# Altium PCB I2C_module_v1.PcbDoc (part 4 of 4)
Units mil, origin at the board's own origin, x right, y up, seen from the top; angles counter-clockwise.
Board outline 3300 x 2890 mil, 2 copper layers (Top Layer, Bottom Layer); 41 components, 28 nets, 177 pads, 28 vias.
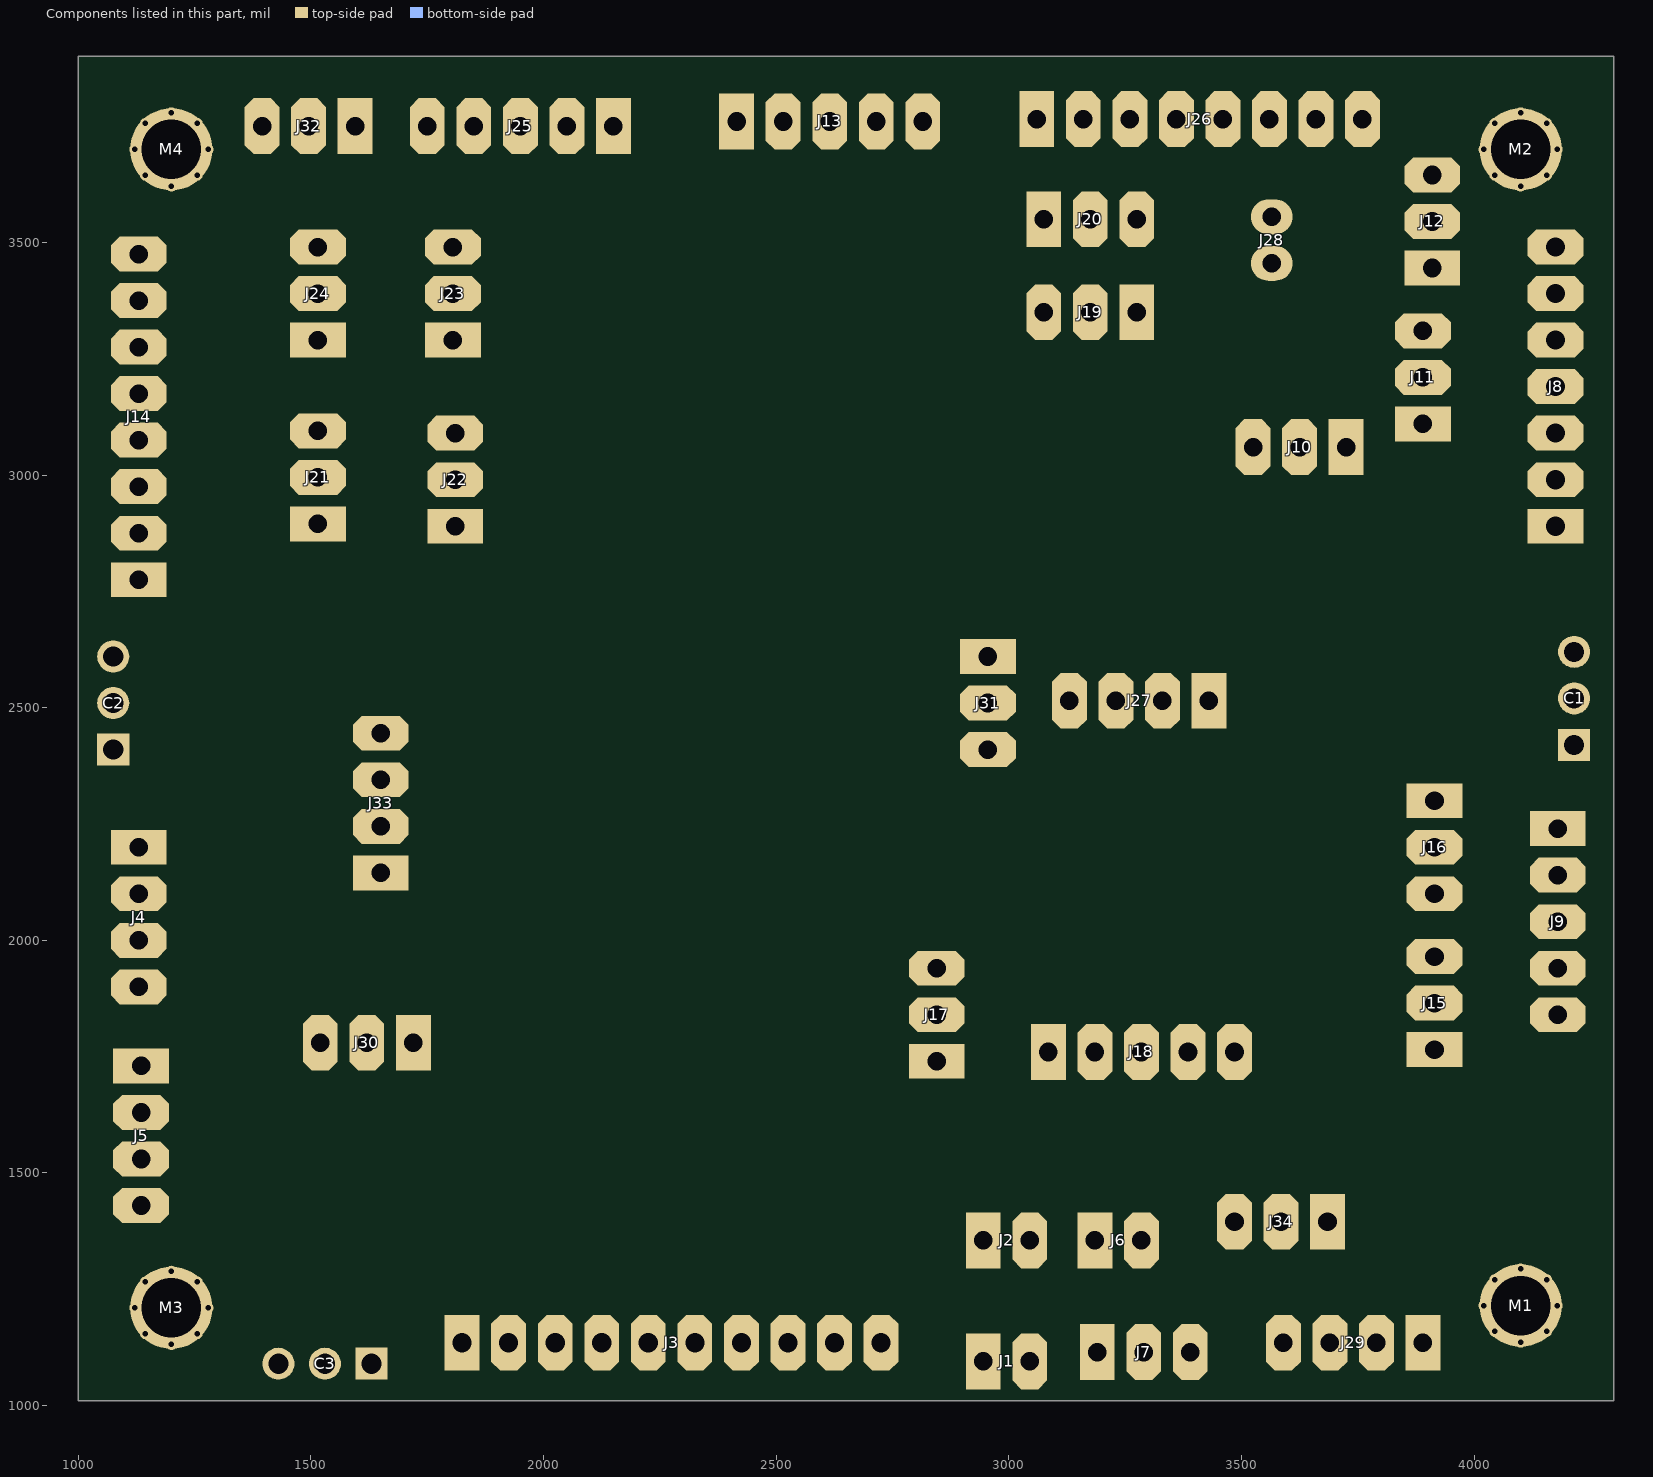
[diagram p4: the components of this part, seen from the top]

## Via types
v1: diameter 50, hole 28, Top Layer to Bottom Layer, 28 vias

## Nets (pads, with @x,y where several pads share a name; then routed paths per layer and width w, separated by ;. In a path a pad name is that pad's centre, name@x,y a point inside that pad or via, vN(x,y) a via of type N, cw(c..) or ccw(c..) an arc to the next point about the centre after c; other vN are vias at no path point) (continued)
copper on no net: (continued)
  Top Layer w0.3: 2066.4,2140.1 2068.8,2140.1 ; 2066.4,2153 2073.9,2153 ; 2066.4,2157.2 2073.9,2157.2 ; 2066.4,2157.5 2073.9,2157.5 ; 2066.4,2189.9 2073.9,2189.9 ; 2066.4,2190.2 2073.9,2190.2 ; 2066.4,2194.4 2073.9,2194.4 ; 2066.4,2282.6 2079.6,2282.6 ; 2066.4,2386.7 2069.7,2386.7 ; 2066.7,2130.5 2068.8,2130.5 ; 2066.7,2130.8 2068.8,2130.8 ; 2066.7,2131.1 2068.8,2131.1 ; 2066.7,2131.4 2068.8,2131.4 ; 2066.7,2131.7 2068.8,2131.7 ; 2066.7,2132 2068.8,2132 ; 2066.7,2132.3 2068.8,2132.3 ; 2066.7,2132.6 2068.8,2132.6 ; 2066.7,2132.9 2068.8,2132.9 ; 2066.7,2133.2 2068.8,2133.2 ; 2066.7,2133.5 2068.8,2133.5 ; 2066.7,2133.8 2068.8,2133.8 ; 2066.7,2134.1 2068.8,2134.1 ; 2066.7,2134.4 2068.8,2134.4 ; 2066.7,2134.7 2068.8,2134.7 ; 2066.7,2135 2068.8,2135 ; 2066.7,2135.3 2068.8,2135.3 ; 2066.7,2135.6 2068.8,2135.6 ; 2066.7,2135.9 2068.8,2135.9 ; 2066.7,2136.2 2068.8,2136.2 ; 2066.7,2136.5 2068.8,2136.5 ; 2066.7,2136.8 2068.8,2136.8 ; 2066.7,2137.1 2068.8,2137.1 ; 2066.7,2137.4 2068.8,2137.4 ; 2066.7,2137.7 2068.8,2137.7 ; 2066.7,2138 2068.8,2138 ; 2066.7,2138.3 2068.8,2138.3 ; 2066.7,2138.6 2068.8,2138.6 ; 2066.7,2138.9 2068.8,2138.9 ; 2066.7,2152.4 2073.6,2152.4 ; 2066.7,2152.7 2073.6,2152.7 ; 2066.7,2157.8 2073.6,2157.8 ; 2066.7,2189.6 2073.6,2189.6 ; 2066.7,2194.7 2073.9,2194.7 ; 2066.7,2195 2073.6,2195 ; 2067,2152.1 2073.3,2152.1 ; 2067,2158.1 2073.3,2158.1 ; 2067,2189.3 2073.3,2189.3 ; 2067,2195.3 2073.3,2195.3 ; 2067,2282.9 2080.2,2282.9 ; 2067,2387 2070,2387 ; 2067.3,2151.8 2073,2151.8 ; 2067.3,2158.4 2073,2158.4 ; 2067.3,2189 2073,2189 ; 2067.3,2195.6 2073,2195.6 ; 2067.3,2387.3 2070.3,2387.3 ; 2067.6,2158.7 2072.7,2158.7 ; 2067.6,2188.7 2072.7,2188.7 ; 2067.6,2387.6 2070.6,2387.6 ; 2067.6,2459 2111.1,2459 ; 2067.9,2151.5 2072.4,2151.5 ; 2067.9,2195.9 2072.4,2195.9 ; 2067.9,2283.2 2080.8,2283.2 ; 2067.9,2387.9 2071.2,2387.9 ; 2068.2,2159 2072.1,2159 ; 2068.2,2188.4 2072.1,2188.4 ; 2068.2,2196.2 2072.1,2196.2 ; 2068.2,2388.2 2071.5,2388.2 ; 2068.5,2151.2 2072.1,2151.2 ; 2068.5,2283.5 2081.4,2283.5 ; 2068.5,2388.5 2071.8,2388.5 ; 2068.8,2388.8 2072.1,2388.8 ; 2069.1,2159.3 2071.2,2159.3 ; 2069.1,2188.1 2071.2,2188.1 ; 2069.1,2283.8 2082,2283.8 ; 2069.4,2150.9 2070.9,2150.9 ; 2069.4,2196.5 2070.9,2196.5 ; 2069.4,2389.1 2072.7,2389.1 ; 2069.4,2458.7 2111.7,2458.7 ; 2069.7,2284.1 2082.6,2284.1 ; 2069.7,2389.4 2073,2389.4 ; 2070,2389.7 2073.3,2389.7 ; 2070.3,2284.4 2082.9,2284.4 ; 2070.3,2390 2073.6,2390 ; 2070.6,2390.3 2073.9,2390.3 ; 2070.9,2284.7 2083.5,2284.7 ; 2070.9,2390.6 2074.5,2390.6 ; 2070.9,2458.4 2112,2458.4 ; 2071.2,2390.9 2074.8,2390.9 ; 2071.5,2285 2084.1,2285 ; 2071.8,2391.2 2075.1,2391.2 ; 2072.1,2285.3 2084.7,2285.3 ; 2072.1,2391.5 2075.4,2391.5 ; 2072.4,2391.8 2076,2391.8 ; 2072.4,2458.1 2112.6,2458.1 ; 2072.7,2285.6 2085.3,2285.6 ; 2072.7,2392.1 2076.3,2392.1 ; 2073,2392.4 2076.6,2392.4 ; 2073.3,2285.9 2085.9,2285.9 ; 2073.3,2392.7 2076.9,2392.7 ; 2073.6,2286.2 2086.2,2286.2 ; 2073.6,2393 2077.5,2393 ; 2073.9,2393.3 2077.8,2393.3 ; 2073.9,2457.8 2112.9,2457.8 ; 2074.2,2286.5 2086.8,2286.5 ; 2074.5,2393.6 2078.1,2393.6 ; 2074.8,2286.8 2087.4,2286.8 ; 2074.8,2393.9 2078.4,2393.9 ; 2075.1,2394.2 2078.7,2394.2 ; 2075.1,2457.5 2113.5,2457.5 ; 2075.4,2287.1 2087.7,2287.1 ; 2075.4,2394.5 2079.3,2394.5 ; 2075.7,2394.8 2079.6,2394.8 ; 2076,2153 2084.7,2153 ; 2076,2194.4 2084.7,2194.4 ; 2076,2287.4 2088.3,2287.4 ; 2076,2395.1 2079.9,2395.1 ; 2076,2457.2 2114.1,2457.2 ; 2076.3,2151.5 2084.4,2151.5 ; 2076.3,2151.8 2084.4,2151.8 ; 2076.3,2152.1 2084.7,2152.1 ; 2076.3,2152.4 2084.7,2152.4 ; 2076.3,2152.7 2084.7,2152.7 ; 2076.3,2153.3 2084.7,2153.3 ; 2076.3,2153.6 2084.7,2153.6 ; 2076.3,2153.9 2084.7,2153.9 ; 2076.3,2154.2 2084.7,2154.2 ; 2076.3,2154.5 2084.4,2154.5 ; 2076.3,2154.8 2084.4,2154.8 ; 2076.3,2192.9 2084.4,2192.9 ; 2076.3,2193.2 2084.7,2193.2 ; 2076.3,2193.5 2084.7,2193.5 ; 2076.3,2193.8 2084.7,2193.8 ; 2076.3,2194.1 2084.7,2194.1 ; 2076.3,2194.7 2084.7,2194.7 ; 2076.3,2195 2084.7,2195 ; 2076.3,2195.3 2084.7,2195.3 ; 2076.3,2195.6 2084.4,2195.6 ; 2076.3,2195.9 2084.4,2195.9 ; 2076.3,2287.7 2088.9,2287.7 ; 2076.3,2395.4 2080.2,2395.4 ; 2076.6,2150.9 2084.1,2150.9 ; 2076.6,2151.2 2084.4,2151.2 ; 2076.6,2155.1 2084.4,2155.1 ; 2076.6,2192.3 2084.1,2192.3 ; 2076.6,2192.6 2084.4,2192.6 ; 2076.6,2196.2 2084.4,2196.2 ; 2076.6,2196.5 2084.1,2196.5 ; 2076.9,2150.6 2084.1,2150.6 ; 2076.9,2155.4 2084.1,2155.4 ; 2076.9,2155.7 2083.8,2155.7 ; 2076.9,2191.7 2083.8,2191.7 ; 2076.9,2192 2084.1,2192 ; 2076.9,2196.8 2084.1,2196.8 ; 2076.9,2288 2089.2,2288 ; 2076.9,2395.7 2080.8,2395.7 ; 2077.2,2150.3 2083.8,2150.3 ; 2077.2,2156 2083.5,2156 ; 2077.2,2191.4 2083.5,2191.4 ; 2077.2,2197.1 2083.8,2197.1 ; 2077.2,2396 2081.1,2396 ; 2077.2,2456.9 2114.4,2456.9 ; 2077.5,2150 2083.5,2150 ; 2077.5,2156.3 2083.2,2156.3 ; 2077.5,2191.1 2083.2,2191.1 ; 2077.5,2197.4 2083.5,2197.4 ; 2077.5,2288.3 2089.8,2288.3 ; 2077.5,2396.3 2081.4,2396.3 ; 2077.8,2149.7 2083.2,2149.7 ; 2077.8,2156.6 2082.9,2156.6 ; 2077.8,2190.8 2082.9,2190.8 ; 2077.8,2197.7 2083.2,2197.7 ; 2077.8,2288.6 2090.4,2288.6 ; 2077.8,2396.6 2081.7,2396.6 ; 2078.1,2149.4 2082.6,2149.4 ; 2078.1,2198 2082.6,2198 ; 2078.1,2396.9 2082,2396.9 ; 2078.1,2456.6 2115,2456.6 ; 2078.4,2156.9 2082.6,2156.9 ; 2078.4,2190.5 2082.3,2190.5 ; 2078.4,2288.9 2090.7,2288.9 ; 2078.4,2397.2 2082.6,2397.2 ; 2078.7,2149.1 2082,2149.1 ; 2078.7,2198.3 2082.3,2198.3 ; 2078.7,2397.5 2082.9,2397.5 ; 2079,2157.2 2081.7,2157.2 ; 2079,2289.2 2091.3,2289.2 ; 2079.3,2190.2 2081.7,2190.2 ; 2079.3,2289.5 2091.6,2289.5 ; 2079.3,2397.8 2083.2,2397.8 ; 2079.3,2456.3 2115.3,2456.3 ; 2079.6,2132.6 2082.3,2132.6 ; 2079.6,2132.9 2082.3,2132.9 ; 2079.6,2133.2 2082,2133.2 ; 2079.6,2133.5 2082,2133.5 ; 2079.6,2133.8 2082,2133.8 ; 2079.6,2134.1 2082,2134.1 ; 2079.6,2134.4 2082,2134.4 ; 2079.6,2134.7 2082,2134.7 ; 2079.6,2135 2082,2135 ; 2079.6,2135.3 2082,2135.3 ; 2079.6,2135.6 2082,2135.6 ; 2079.6,2135.9 2082.3,2135.9 ; 2079.6,2136.2 2082.3,2136.2 ; 2079.6,2398.1 2083.5,2398.1 ; 2079.9,2131.7 2082.6,2131.7 ; 2079.9,2132 2082.3,2132 ; 2079.9,2132.3 2082.3,2132.3 ; 2079.9,2136.5 2082.3,2136.5 ; 2079.9,2136.8 2082.3,2136.8 ; 2079.9,2137.1 2082.3,2137.1 ; 2079.9,2137.4 2082.6,2137.4 ; 2079.9,2198.6 2081.1,2198.6 ; 2079.9,2289.8 2092.2,2289.8 ; 2079.9,2398.4 2084.1,2398.4 ; 2080.2,2131.1 2082.6,2131.1 ; 2080.2,2131.4 2082.6,2131.4 ; 2080.2,2137.7 2082.6,2137.7 ; 2080.2,2138 2082.6,2138 ; 2080.2,2290.1 2092.5,2290.1 ; 2080.2,2398.7 2084.4,2398.7 ; 2080.2,2456 2115.9,2456 ; 2080.5,2130.5 2083.2,2130.5 ; 2080.5,2130.8 2082.9,2130.8 ; 2080.5,2138.3 2082.9,2138.3 ; 2080.5,2138.6 2082.9,2138.6 ; 2080.5,2399 2084.7,2399 ; 2080.8,2129.9 2083.5,2129.9 ; 2080.8,2130.2 2083.2,2130.2 ; 2080.8,2138.9 2083.2,2138.9 ; 2080.8,2290.4 2093.1,2290.4 ; 2080.8,2399.3 2085,2399.3 ; 2081.1,2129.6 2084.1,2129.6 ; 2081.1,2139.2 2083.5,2139.2 ; 2081.1,2399.6 2085.6,2399.6 ; 2081.1,2455.7 2116.2,2455.7 ; 2081.4,2129.3 2084.4,2129.3 ; 2081.4,2139.5 2083.5,2139.5 ; 2081.4,2290.7 2093.4,2290.7 ; 2081.7,2129 2085,2129 ; 2081.7,2139.8 2083.8,2139.8 ; 2081.7,2291 2094,2291 ; 2081.7,2399.9 2085.9,2399.9 ; 2081.7,2455.4 2116.8,2455.4 ; 2082,2140.1 2084.4,2140.1 ; 2082,2400.2 2086.2,2400.2 ; 2082.3,2140.4 2085,2140.4 ; 2082.3,2291.3 2094.3,2291.3 ; 2082.3,2400.5 2086.5,2400.5 ; 2082.6,2140.7 2086.2,2140.7 ; 2082.6,2291.6 2094.9,2291.6 ; 2082.6,2400.8 2086.8,2400.8 ; 2082.6,2455.1 2117.1,2455.1 ; 2082.9,2401.1 2087.4,2401.1 ; 2083.2,2141 2089.5,2141 ; 2083.2,2291.9 2095.2,2291.9 ; 2083.2,2401.4 2087.7,2401.4 ; 2083.5,2292.2 2095.8,2292.2 ; 2083.5,2401.7 2088,2401.7 ; 2083.5,2454.8 2117.4,2454.8 ; 2083.8,2141.3 2088.6,2141.3 ; 2084.1,2292.5 2096.1,2292.5 ; 2084.1,2402 2088.3,2402 ; 2084.1,2454.5 2118,2454.5 ; 2084.4,2292.8 2096.7,2292.8 ; 2084.4,2402.3 2088.9,2402.3 ; 2084.7,2402.6 2089.2,2402.6 ; 2085,2141.6 2087.7,2141.6 ; 2085,2293.1 2097,2293.1 ; 2085,2402.9 2089.5,2402.9 ; 2085,2454.2 2118.3,2454.2 ; 2085.3,2293.4 2097.3,2293.4 ; 2085.3,2403.2 2089.8,2403.2 ; 2085.6,2293.7 2097.9,2293.7 ; 2085.6,2403.5 2090.1,2403.5 ; 2085.6,2453.9 2118.6,2453.9 ; 2085.9,2403.8 2090.7,2403.8 ; 2086.2,2294 2098.2,2294 ; 2086.5,2149.1 2091.3,2149.1 ; 2086.5,2149.4 2092.8,2149.4 ; 2086.5,2149.7 2094.3,2149.7 ; 2086.5,2150 2095.5,2150 ; 2086.5,2150.3 2096.4,2150.3 ; 2086.5,2150.6 2097.3,2150.6 ; 2086.5,2150.9 2098.2,2150.9 ; 2086.5,2151.2 2098.8,2151.2 ; 2086.5,2151.5 2099.7,2151.5 ; 2086.5,2151.8 2100.3,2151.8 ; 2086.5,2152.1 2100.9,2152.1 ; 2086.5,2152.4 2101.5,2152.4 ; 2086.5,2152.7 2102.1,2152.7 ; 2086.5,2153 2102.7,2153 ; 2086.5,2153.3 2103,2153.3 ; 2086.5,2153.6 2103.6,2153.6 ; 2086.5,2153.9 2104.2,2153.9 ; 2086.5,2154.2 2104.5,2154.2 ; 2086.5,2154.5 2105.1,2154.5 ; 2086.5,2154.8 2105.4,2154.8 ; 2086.5,2155.1 2105.7,2155.1 ; 2086.5,2155.4 2106.3,2155.4 ; 2086.5,2155.7 2106.6,2155.7 ; 2086.5,2156 2106.9,2156 ; 2086.5,2156.3 2107.2,2156.3 ; 2086.5,2156.6 2107.5,2156.6 ; 2086.5,2156.9 2107.8,2156.9 ; 2086.5,2157.2 2108.1,2157.2 ; 2086.5,2190.2 2108.4,2190.2 ; 2086.5,2190.5 2108.1,2190.5 ; 2086.5,2190.8 2107.8,2190.8 ; 2086.5,2191.1 2107.2,2191.1 ; 2086.5,2191.4 2106.9,2191.4 ; 2086.5,2191.7 2106.6,2191.7 ; 2086.5,2192 2106.3,2192 ; 2086.5,2192.3 2106,2192.3 ; 2086.5,2192.6 2105.4,2192.6 ; 2086.5,2192.9 2105.1,2192.9 ; 2086.5,2193.2 2104.5,2193.2 ; 2086.5,2193.5 2104.2,2193.5 ; 2086.5,2193.8 2103.6,2193.8 ; 2086.5,2194.1 2103.3,2194.1 ; 2086.5,2194.4 2102.7,2194.4 ; 2086.5,2194.7 2102.1,2194.7 ; 2086.5,2195 2101.5,2195 ; 2086.5,2195.3 2100.9,2195.3 ; 2086.5,2195.6 2100.3,2195.6 ; 2086.5,2195.9 2099.7,2195.9 ; 2086.5,2196.2 2099.1,2196.2 ; 2086.5,2196.5 2098.2,2196.5 ; 2086.5,2196.8 2097.6,2196.8 ; 2086.5,2197.1 2096.7,2197.1 ; 2086.5,2197.4 2095.8,2197.4 ; 2086.5,2197.7 2094.6,2197.7 ; 2086.5,2198 2093.1,2198 ; 2086.5,2198.3 2091.6,2198.3 ; 2086.5,2198.6 2088.6,2198.6 ; 2086.5,2294.3 2098.5,2294.3 ; 2086.5,2404.1 2091,2404.1 ; 2086.5,2453.6 2119.2,2453.6 ; 2086.8,2140.7 2091,2140.7 ; 2086.8,2404.4 2091.3,2404.4 ; 2087.1,2294.6 2099.1,2294.6 ; 2087.1,2404.7 2091.6,2404.7 ; 2087.1,2453.3 2119.5,2453.3 ; 2087.4,2294.9 2099.4,2294.9 ; 2087.4,2405 2092.2,2405 ; 2087.7,2295.2 2099.7,2295.2 ; 2087.7,2405.3 2092.5,2405.3 ; 2087.7,2453 2119.8,2453 ; 2088,2140.4 2091.3,2140.4 ; 2088,2405.6 2092.8,2405.6 ; 2088.3,2157.5 2108.4,2157.5 ; 2088.3,2295.5 2100.3,2295.5 ; 2088.3,2405.9 2093.1,2405.9 ; 2088.3,2452.7 2120.1,2452.7 ; 2088.6,2129 2090.1,2129 ; 2088.6,2140.1 2091.3,2140.1 ; 2088.6,2295.8 2100.6,2295.8 ; 2088.9,2189.9 2108.7,2189.9 ; 2088.9,2406.2 2093.7,2406.2 ; 2089.2,2129.3 2090.4,2129.3 ; 2089.2,2139.8 2091.3,2139.8 ; 2089.2,2296.1 2100.9,2296.1 ; 2089.2,2406.5 2094,2406.5 ; 2089.2,2452.4 2120.7,2452.4 ; 2089.5,2129.6 2090.7,2129.6 ; 2089.5,2139.5 2091.3,2139.5 ; 2089.5,2296.4 2101.5,2296.4 ; 2089.5,2406.8 2094.3,2406.8 ; 2089.8,2129.9 2091,2129.9 ; 2089.8,2138.9 2091.3,2138.9 ; 2089.8,2139.2 2091.3,2139.2 ; 2089.8,2296.7 2101.8,2296.7 ; 2089.8,2407.1 2094.6,2407.1 ; 2089.8,2452.1 2121,2452.1 ; 2090.1,2130.2 2091.3,2130.2 ; 2090.1,2138.3 2091.3,2138.3 ; 2090.1,2138.6 2091.3,2138.6 ; 2090.1,2141 2091,2141 ; 2090.1,2407.4 2094.9,2407.4 ; 2090.4,2130.5 2091.3,2130.5 ; 2090.4,2137.7 2091.3,2137.7 ; 2090.4,2138 2091.3,2138 ; 2090.4,2141.3 2091,2141.3 ; 2090.4,2141.6 2091,2141.6 ; 2090.4,2157.8 2108.7,2157.8 ; 2090.4,2297 2102.1,2297 ; 2090.4,2407.7 2095.5,2407.7 ; 2090.4,2451.8 2121.3,2451.8 ; 2090.7,2130.8 2091.6,2130.8 ; 2090.7,2131.1 2091.6,2131.1 ; 2090.7,2137.1 2091.3,2137.1 ; 2090.7,2137.4 2091.3,2137.4 ; 2090.7,2297.3 2102.4,2297.3 ; 2090.7,2408 2095.8,2408 ; 2091,2131.4 2091.3,2131.4 ; 2091,2189.6 2109,2189.6 ; 2091,2297.6 2103,2297.6 ; 2091,2408.3 2096.1,2408.3 ; 2091,2451.5 2121.6,2451.5 ; 2091.3,2297.9 2103.3,2297.9 ; 2091.6,2408.6 2096.4,2408.6 ; 2091.6,2451.2 2121.9,2451.2 ; 2091.9,2158.1 2109,2158.1 ; 2091.9,2298.2 2103.6,2298.2 ; 2091.9,2408.9 2097,2408.9 ; 2092.2,2189.3 2109.3,2189.3 ; 2092.2,2298.5 2103.9,2298.5 ; 2092.2,2409.2 2097.3,2409.2 ; 2092.2,2450.9 2122.2,2450.9 ; 2092.5,2298.8 2104.2,2298.8 ; 2092.5,2409.5 2097.6,2409.5 ; 2092.5,2450.6 2122.8,2450.6 ; 2092.8,2409.8 2097.9,2409.8 ; 2093.1,2158.4 2109.3,2158.4 ; 2093.1,2189 2109.6,2189 ; 2093.1,2299.1 2104.8,2299.1 ; 2093.1,2410.1 2098.2,2410.1 ; 2093.1,2450.3 2123.1,2450.3 ; 2093.4,2299.4 2105.1,2299.4 ; 2093.4,2410.4 2098.8,2410.4 ; 2093.7,2299.7 2105.4,2299.7 ; 2093.7,2450 2123.4,2450 ; 2094,2158.7 2109.6,2158.7 ; 2094,2188.7 2109.6,2188.7 ; 2094,2300 2105.7,2300 ; 2094,2410.7 2099.1,2410.7 ; 2094.3,2300.3 2106,2300.3 ; 2094.3,2411 2099.4,2411 ; 2094.3,2449.7 2123.7,2449.7 ; 2094.6,2159 2109.9,2159 ; 2094.6,2411.3 2099.7,2411.3 ; 2094.9,2188.4 2109.9,2188.4 ; 2094.9,2300.6 2106.6,2300.6 ; 2094.9,2411.6 2100.3,2411.6 ; 2094.9,2449.4 2124,2449.4 ; 2095.2,2300.9 2106.9,2300.9 ; 2095.2,2411.9 2100.6,2411.9 ; 2095.5,2159.3 2110.2,2159.3 ; 2095.5,2301.2 2107.2,2301.2 ; 2095.5,2412.2 2100.9,2412.2 ; 2095.5,2449.1 2124.3,2449.1 ; 2095.8,2188.1 2110.2,2188.1 ; 2095.8,2301.5 2107.5,2301.5 ; 2095.8,2412.5 2101.2,2412.5 ; 2095.8,2448.8 2124.6,2448.8 ; 2096.1,2159.6 2110.5,2159.6 ; 2096.1,2301.8 2107.8,2301.8 ; 2096.4,2187.8 2110.5,2187.8 ; 2096.4,2412.8 2101.8,2412.8 ; 2096.4,2448.5 2124.9,2448.5 ; 2096.7,2159.9 2110.5,2159.9 ; 2096.7,2302.1 2108.1,2302.1 ; 2096.7,2413.1 2102.1,2413.1 ; 2097,2187.5 2110.8,2187.5 ; 2097,2302.4 2108.4,2302.4 ; 2097,2413.4 2102.4,2413.4 ; 2097,2448.2 2125.2,2448.2 ; 2097.3,2160.2 2110.8,2160.2 ; 2097.3,2302.7 2108.7,2302.7 ; 2097.3,2413.7 2102.7,2413.7 ; 2097.3,2447.9 2125.5,2447.9 ; 2097.6,2187.2 2110.8,2187.2 ; 2097.6,2303 2109,2303 ; 2097.6,2414 2103,2414 ; 2097.9,2160.5 2111.1,2160.5 ; 2097.9,2303.3 2109.6,2303.3 ; 2097.9,2414.3 2103.6,2414.3 ; 2097.9,2447.6 2125.8,2447.6 ; 2098.2,2186.9 2111.1,2186.9 ; 2098.2,2303.6 2109.9,2303.6 ; 2098.2,2414.6 2103.9,2414.6 ; 2098.5,2160.8 2111.4,2160.8 ; 2098.5,2186.6 2111.4,2186.6 ; 2098.5,2303.9 2110.2,2303.9 ; 2098.5,2447.3 2126.1,2447.3 ; 2098.8,2304.2 2110.5,2304.2 ; 2098.8,2414.9 2104.2,2414.9 ; 2098.8,2447 2126.4,2447 ; 2099.1,2161.1 2111.4,2161.1 ; 2099.1,2186.3 2111.7,2186.3 ; 2099.1,2304.5 2110.8,2304.5 ; 2099.1,2415.2 2104.5,2415.2 ; 2099.4,2161.4 2111.7,2161.4 ; 2099.4,2415.5 2105.1,2415.5 ; 2099.4,2446.7 2126.7,2446.7 ; 2099.7,2186 2111.7,2186 ; 2099.7,2304.8 2111.1,2304.8 ; 2099.7,2415.8 2105.4,2415.8 ; 2099.7,2446.4 2127,2446.4 ; 2100,2161.7 2112,2161.7 ; 2100,2185.7 2112,2185.7 ; 2100,2305.1 2111.4,2305.1 ; 2100,2416.1 2105.7,2416.1 ; 2100.3,2162 2112,2162 ; 2100.3,2185.4 2112.3,2185.4 ; 2100.3,2305.4 2111.7,2305.4 ; 2100.3,2416.4 2106,2416.4 ; 2100.3,2446.1 2127.3,2446.1 ; 2100.6,2162.3 2112.3,2162.3 ; 2100.6,2305.7 2112,2305.7 ; 2100.6,2416.7 2106.3,2416.7 ; 2100.9,2162.6 2112.6,2162.6 ; 2100.9,2185.1 2112.3,2185.1 ; 2100.9,2306 2112.3,2306 ; 2100.9,2445.8 2127.6,2445.8 ; 2101.2,2184.8 2112.6,2184.8 ; 2101.2,2306.3 2112.6,2306.3 ; 2101.2,2417 2106.9,2417 ; 2101.2,2445.5 2127.6,2445.5 ; 2101.5,2162.9 2112.6,2162.9 ; 2101.5,2184.5 2112.6,2184.5 ; 2101.5,2306.6 2112.9,2306.6 ; 2101.5,2417.3 2107.2,2417.3 ; 2101.8,2163.2 2112.9,2163.2 ; 2101.8,2184.2 2112.9,2184.2 ; 2101.8,2306.9 2113.2,2306.9 ; 2101.8,2417.6 2107.5,2417.6 ; 2101.8,2445.2 2127.9,2445.2 ; 2102.1,2163.5 2112.9,2163.5 ; 2102.1,2183.9 2112.9,2183.9 ; 2102.1,2307.2 2113.5,2307.2 ; 2102.1,2417.9 2107.8,2417.9 ; 2102.1,2444.9 2128.2,2444.9 ; 2102.4,2163.8 2113.2,2163.8 ; 2102.4,2183.6 2113.2,2183.6 ; 2102.4,2307.5 2113.8,2307.5 ; 2102.4,2418.2 2108.4,2418.2 ; 2102.7,2164.1 2113.2,2164.1 ; 2102.7,2183.3 2113.2,2183.3 ; 2102.7,2307.8 2114.1,2307.8 ; 2102.7,2418.5 2108.7,2418.5 ; 2102.7,2444.6 2128.5,2444.6 ; 2103,2164.4 2113.5,2164.4 ; 2103,2183 2113.5,2183 ; 2103,2308.1 2114.4,2308.1 ; 2103,2418.8 2109,2418.8 ; 2103,2444.3 2128.8,2444.3 ; 2103.3,2164.7 2113.5,2164.7 ; 2103.3,2182.7 2113.5,2182.7 ; 2103.3,2308.4 2114.7,2308.4 ; 2103.3,2444 2129.1,2444 ; 2103.6,2165 2113.8,2165 ; 2103.6,2165.3 2113.8,2165.3 ; 2103.6,2182.4 2113.8,2182.4 ; 2103.6,2308.7 2115,2308.7 ; 2103.6,2419.1 2109.3,2419.1 ; 2103.9,2165.6 2113.8,2165.6 ; 2103.9,2181.8 2114.1,2181.8 ; 2103.9,2182.1 2113.8,2182.1 ; 2103.9,2309 2115.3,2309 ; 2103.9,2419.4 2109.9,2419.4 ; 2103.9,2443.7 2129.1,2443.7 ; 2104.2,2165.9 2114.1,2165.9 ; 2104.2,2181.5 2114.1,2181.5 ; 2104.2,2309.3 2115.6,2309.3 ; 2104.2,2419.7 2110.2,2419.7 ; 2104.2,2443.4 2129.4,2443.4 ; 2104.5,2166.2 2114.1,2166.2 ; 2104.5,2166.5 2114.4,2166.5 ; 2104.5,2181.2 2114.1,2181.2 ; 2104.5,2309.6 2115.9,2309.6 ; 2104.5,2420 2110.5,2420 ; 2104.8,2166.8 2114.4,2166.8 ; 2104.8,2180.6 2114.4,2180.6 ; 2104.8,2180.9 2114.4,2180.9 ; 2104.8,2309.9 2116.2,2309.9 ; 2104.8,2420.3 2110.8,2420.3 ; 2104.8,2443.1 2129.7,2443.1 ; 2105.1,2167.1 2114.4,2167.1 ; 2105.1,2167.4 2114.7,2167.4 ; 2105.1,2180 2114.7,2180 ; 2105.1,2180.3 2114.4,2180.3 ; 2105.1,2310.2 2116.2,2310.2 ; 2105.1,2310.5 2116.5,2310.5 ; 2105.1,2420.6 2111.1,2420.6 ; 2105.1,2442.8 2130,2442.8 ; 2105.4,2167.7 2114.7,2167.7 ; 2105.4,2168 2114.7,2168 ; 2105.4,2179.4 2114.7,2179.4 ; 2105.4,2179.7 2114.7,2179.7 ; 2105.4,2310.8 2116.8,2310.8 ; 2105.4,2420.9 2111.7,2420.9 ; 2105.4,2442.5 2138.1,2442.5 ; 2105.7,2168.3 2114.7,2168.3 ; 2105.7,2168.6 2115,2168.6 ; 2105.7,2178.8 2115,2178.8 ; 2105.7,2179.1 2114.7,2179.1 ; 2105.7,2311.1 2117.1,2311.1 ; 2106,2168.9 2115,2168.9 ; 2106,2169.2 2115,2169.2 ; 2106,2178.2 2115,2178.2 ; 2106,2178.5 2115,2178.5 ; 2106,2311.4 2117.4,2311.4 ; 2106,2421.2 2112,2421.2 ; 2106,2442.2 2137.8,2442.2 ; 2106.3,2169.5 2115,2169.5 ; 2106.3,2169.8 2115,2169.8 ; 2106.3,2170.1 2115.3,2170.1 ; 2106.3,2177.3 2115.3,2177.3 ; 2106.3,2177.6 2115.3,2177.6 ; 2106.3,2177.9 2115,2177.9 ; 2106.3,2311.7 2117.7,2311.7 ; 2106.3,2421.5 2112.3,2421.5 ; 2106.3,2441.9 2137.5,2441.9 ; 2106.6,2170.4 2115.3,2170.4 ; 2106.6,2170.7 2115.3,2170.7 ; 2106.6,2171 2115.3,2171 ; 2106.6,2171.3 2115.3,2171.3 ; 2106.6,2171.6 2115.3,2171.6 ; 2106.6,2175.8 2115.3,2175.8 ; 2106.6,2176.1 2115.3,2176.1 ; 2106.6,2176.4 2115.3,2176.4 ; 2106.6,2176.7 2115.3,2176.7 ; 2106.6,2177 2115.3,2177 ; 2106.6,2312 2118,2312 ; 2106.6,2421.8 2112.6,2421.8 ; 2106.6,2441.6 2136.9,2441.6 ; 2106.9,2171.9 2115.3,2171.9 ; 2106.9,2172.2 2115.3,2172.2 ; 2106.9,2172.5 2115.3,2172.5 ; 2106.9,2172.8 2115.3,2172.8 ; 2106.9,2173.1 2115.6,2173.1 ; 2106.9,2173.4 2115.6,2173.4 ; 2106.9,2173.7 2115.6,2173.7 ; 2106.9,2174 2115.6,2174 ; 2106.9,2174.3 2115.6,2174.3 ; 2106.9,2174.6 2115.6,2174.6 ; 2106.9,2174.9 2115.3,2174.9 ; 2106.9,2175.2 2115.3,2175.2 ; 2106.9,2175.5 2115.3,2175.5 ; 2106.9,2312.3 2118.3,2312.3 ; 2106.9,2422.1 2113.2,2422.1 ; 2107.2,2312.6 2118.6,2312.6 ; 2107.2,2422.4 2113.5,2422.4 ; 2107.2,2441.3 2136.6,2441.3 ; 2107.5,2312.9 2118.6,2312.9 ; 2107.5,2422.7 2113.8,2422.7 ; 2107.5,2441 2136.3,2441 ; 2107.8,2313.2 2118.9,2313.2 ; 2107.8,2313.5 2119.2,2313.5 ; 2107.8,2423 2114.1,2423 ; 2107.8,2440.7 2136,2440.7 ; 2108.1,2313.8 2119.5,2313.8 ; 2108.1,2423.3 2114.4,2423.3 ; 2108.4,2314.1 2119.8,2314.1 ; 2108.4,2440.4 2135.4,2440.4 ; 2108.7,2314.4 2120.1,2314.4 ; 2108.7,2423.6 2115,2423.6 ; 2108.7,2440.1 2135.1,2440.1 ; 2109,2314.7 2120.4,2314.7 ; 2109,2423.9 2115.3,2423.9 ; 2109,2439.8 2134.8,2439.8 ; 2109.3,2315 2120.4,2315 ; 2109.3,2315.3 2120.7,2315.3 ; 2109.3,2424.2 2115.6,2424.2 ; 2109.3,2439.5 2134.5,2439.5 ; 2109.6,2315.6 2121,2315.6 ; 2109.6,2424.5 2115.9,2424.5 ; 2109.6,2439.2 2134.2,2439.2 ; 2109.9,2315.9 2121.3,2315.9 ; 2109.9,2424.8 2116.5,2424.8 ; 2110.2,2316.2 2121.6,2316.2 ; 2110.2,2425.1 2116.8,2425.1 ; 2110.2,2438.9 2133.6,2438.9 ; 2110.5,2316.5 2121.6,2316.5 ; 2110.5,2316.8 2121.9,2316.8 ; 2110.5,2425.4 2117.1,2425.4 ; 2110.5,2438.6 2133.3,2438.6 ; 2110.8,2317.1 2122.2,2317.1 ; 2110.8,2438.3 2133,2438.3 ; 2111.1,2317.4 2122.5,2317.4 ; 2111.1,2425.7 2117.4,2425.7 ; 2111.1,2438 2133.3,2438 ; 2111.4,2317.7 2122.8,2317.7 ; 2111.4,2426 2118,2426 ; 2111.4,2437.7 2133.3,2437.7 ; 2111.7,2318 2122.8,2318 ; 2111.7,2318.3 2123.1,2318.3 ; 2111.7,2426.3 2118.3,2426.3 ; 2111.7,2437.4 2133.6,2437.4 ; 2112,2318.6 2123.4,2318.6 ; 2112,2426.6 2118.6,2426.6 ; 2112,2437.1 2133.9,2437.1 ; 2112.3,2318.9 2123.7,2318.9 ; 2112.3,2426.9 2118.9,2426.9 ; 2112.3,2436.8 2133.9,2436.8 ; 2112.6,2319.2 2123.7,2319.2 ; 2112.6,2319.5 2124,2319.5 ; 2112.6,2427.2 2119.2,2427.2 ; 2112.9,2319.8 2124.3,2319.8 ; 2112.9,2427.5 2119.8,2427.5 ; 2112.9,2436.5 2134.2,2436.5 ; 2113.2,2320.1 2124.6,2320.1 ; 2113.2,2436.2 2134.2,2436.2 ; 2113.5,2320.4 2124.6,2320.4 ; 2113.5,2320.7 2124.9,2320.7 ; 2113.5,2427.8 2120.1,2427.8 ; 2113.5,2435.9 2134.5,2435.9 ; 2113.8,2321 2125.2,2321 ; 2113.8,2428.1 2139,2428.1 ; 2113.8,2435.6 2134.8,2435.6 ; 2114.1,2321.3 2125.5,2321.3 ; 2114.1,2428.4 2138.7,2428.4 ; 2114.1,2435.3 2134.8,2435.3 ; 2114.4,2321.6 2125.5,2321.6 ; 2114.4,2321.9 2125.8,2321.9 ; 2114.4,2428.7 2138.7,2428.7 ; 2114.4,2435 2135.1,2435 ; 2114.7,2322.2 2126.1,2322.2 ; 2114.7,2429 2138.4,2429 ; 2114.7,2434.7 2135.1,2434.7 ; 2115,2322.5 2126.1,2322.5 ; 2115,2322.8 2126.4,2322.8 ; 2115,2429.3 2138.4,2429.3 ; 2115,2434.4 2135.4,2434.4 ; 2115.3,2323.1 2126.7,2323.1 ; 2115.3,2429.6 2138.1,2429.6 ; 2115.3,2434.1 2135.7,2434.1 ; 2115.6,2323.4 2126.7,2323.4 ; 2115.6,2323.7 2127,2323.7 ; 2115.6,2433.8 2135.7,2433.8 ; 2115.9,2324 2127.3,2324 ; 2115.9,2429.9 2138.1,2429.9 ; 2115.9,2433.2 2136,2433.2 ; 2115.9,2433.5 2136,2433.5 ; 2116.2,2324.3 2127.6,2324.3 ; 2116.2,2324.6 2127.6,2324.6 ; 2116.2,2430.2 2137.8,2430.2 ; 2116.2,2432.9 2136.3,2432.9 ; 2116.5,2324.9 2127.9,2324.9 ; 2116.5,2430.5 2137.5,2430.5 ; 2116.5,2432.6 2136.6,2432.6 ; 2116.8,2325.2 2128.2,2325.2 ; 2116.8,2325.5 2128.2,2325.5 ; 2116.8,2430.8 2137.5,2430.8 ; 2116.8,2432.3 2136.6,2432.3 ; 2117.1,2325.8 2128.5,2325.8 ; 2117.1,2431.1 2137.2,2431.1 ; 2117.1,2432 2136.9,2432 ; 2117.4,2326.1 2128.5,2326.1 ; 2117.4,2326.4 2128.8,2326.4 ; 2117.4,2431.4 2137.2,2431.4 ; 2117.4,2431.7 2136.9,2431.7 ; 2117.7,2326.7 2129.1,2326.7 ; 2118,2327 2129.1,2327 ; 2118,2327.3 2129.4,2327.3 ; 2118.3,2327.6 2129.7,2327.6 ; 2118.3,2327.9 2129.7,2327.9 ; 2118.6,2328.2 2130,2328.2 ; 2118.9,2328.5 2130.3,2328.5 ; 2118.9,2328.8 2130.3,2328.8 ; 2119.2,2329.1 2130.6,2329.1 ; 2119.2,2329.4 2130.6,2329.4 ; 2119.5,2329.7 2130.9,2329.7 ; 2119.8,2330 2131.2,2330 ; 2119.8,2330.3 2131.2,2330.3 ; 2120.1,2330.6 2131.5,2330.6 ; 2120.1,2330.9 2131.5,2330.9 ; 2120.4,2331.2 2131.8,2331.2 ; 2120.4,2331.5 2132.1,2331.5 ; 2120.4,2427.8 2139,2427.8 ; 2120.7,2331.8 2132.1,2331.8 ; 2120.7,2427.5 2139.3,2427.5 ; 2121,2332.1 2132.4,2332.1 ; 2121,2332.4 2132.4,2332.4 ; 2121,2427.2 2139.3,2427.2 ; 2121.3,2332.7 2132.7,2332.7 ; 2121.3,2333 2132.7,2333 ; 2121.3,2426.6 2139.6,2426.6 ; 2121.3,2426.9 2139.6,2426.9 ; 2121.6,2333.3 2133,2333.3 ; 2121.6,2333.6 2133.3,2333.6 ; 2121.6,2426.3 2139.9,2426.3 ; 2121.9,2333.9 2133.3,2333.9 ; 2121.9,2334.2 2133.6,2334.2 ; 2121.9,2426 2139.9,2426 ; 2122.2,2334.5 2133.6,2334.5 ; 2122.2,2334.8 2133.9,2334.8 ; 2122.2,2425.4 2140.2,2425.4 ; 2122.2,2425.7 2140.2,2425.7 ; 2122.5,2335.1 2133.9,2335.1 ; 2122.5,2335.4 2134.2,2335.4 ; 2122.5,2425.1 2140.5,2425.1 ; 2122.8,2335.7 2134.2,2335.7 ; 2122.8,2336 2134.5,2336 ; 2122.8,2424.5 2140.8,2424.5 ; 2122.8,2424.8 2140.5,2424.8 ; 2123.1,2336.3 2134.8,2336.3 ; 2123.1,2336.6 2134.8,2336.6 ; 2123.1,2423.9 2141.1,2423.9 ; 2123.1,2424.2 2140.8,2424.2 ; 2123.4,2336.9 2135.1,2336.9 ; 2123.4,2337.2 2135.1,2337.2 ; 2123.4,2423.6 2141.1,2423.6 ; 2123.7,2337.5 2135.4,2337.5 ; 2123.7,2337.8 2135.4,2337.8 ; 2123.7,2423 2141.4,2423 ; 2123.7,2423.3 2141.4,2423.3 ; 2124,2338.1 2135.7,2338.1 ; 2124,2338.4 2135.7,2338.4 ; 2124,2422.7 2141.7,2422.7 ; 2124.3,2338.7 2136,2338.7 ; 2124.3,2339 2136,2339 ; 2124.3,2422.1 2141.7,2422.1 ; 2124.3,2422.4 2141.7,2422.4 ; 2124.6,2339.3 2136.3,2339.3 ; 2124.6,2339.6 2136.3,2339.6 ; 2124.6,2421.5 2142,2421.5 ; 2124.6,2421.8 2142,2421.8 ; 2124.9,2339.9 2136.6,2339.9 ; 2124.9,2340.2 2136.6,2340.2 ; 2124.9,2340.5 2136.9,2340.5 ; 2124.9,2421.2 2142.3,2421.2 ; 2125.2,2340.8 2136.9,2340.8 ; 2125.2,2341.1 2137.2,2341.1 ; 2125.2,2420.6 2142.3,2420.6 ; 2125.2,2420.9 2142.3,2420.9 ; 2125.5,2341.4 2137.2,2341.4 ; 2125.5,2341.7 2137.5,2341.7 ; 2125.5,2420 2142.6,2420 ; 2125.5,2420.3 2142.6,2420.3 ; 2125.8,2342 2137.5,2342 ; 2125.8,2342.3 2137.8,2342.3 ; 2125.8,2419.4 2142.9,2419.4 ; 2125.8,2419.7 2142.9,2419.7 ; 2126.1,2342.6 2137.8,2342.6 ; 2126.1,2342.9 2138.1,2342.9 ; 2126.1,2343.2 2138.1,2343.2 ; 2126.1,2418.8 2143.2,2418.8 ; 2126.1,2419.1 2142.9,2419.1 ; 2126.4,2343.5 2138.4,2343.5 ; 2126.4,2343.8 2138.4,2343.8 ; 2126.4,2418.2 2143.2,2418.2 ; 2126.4,2418.5 2143.2,2418.5 ; 2126.7,2344.1 2138.4,2344.1 ; 2126.7,2344.4 2138.7,2344.4 ; 2126.7,2344.7 2138.7,2344.7 ; 2126.7,2417.6 2143.5,2417.6 ; 2126.7,2417.9 2143.5,2417.9 ; 2127,2345 2139,2345 ; 2127,2345.3 2139,2345.3 ; 2127,2417 2143.8,2417 ; 2127,2417.3 2143.5,2417.3 ; 2127.3,2345.6 2139.3,2345.6 ; 2127.3,2345.9 2139.3,2345.9 ; 2127.3,2346.2 2139.6,2346.2 ; 2127.3,2416.4 2143.8,2416.4 ; 2127.3,2416.7 2143.8,2416.7 ; 2127.6,2346.5 2139.6,2346.5 ; 2127.6,2346.8 2139.9,2346.8 ; 2127.6,2347.1 2139.9,2347.1 ; 2127.6,2415.8 2144.1,2415.8 ; 2127.6,2416.1 2144.1,2416.1 ; 2127.9,2347.4 2139.9,2347.4 ; 2127.9,2347.7 2140.2,2347.7 ; 2127.9,2348 2140.2,2348 ; 2127.9,2415.2 2144.4,2415.2 ; 2127.9,2415.5 2144.1,2415.5 ; 2128.2,2348.3 2140.5,2348.3 ; 2128.2,2348.6 2140.5,2348.6 ; 2128.2,2414.3 2144.4,2414.3 ; 2128.2,2414.6 2144.4,2414.6 ; 2128.2,2414.9 2144.4,2414.9 ; 2128.5,2348.9 2140.8,2348.9 ; 2128.5,2349.2 2140.8,2349.2 ; 2128.5,2349.5 2140.8,2349.5 ; 2128.5,2413.7 2144.7,2413.7 ; 2128.5,2414 2144.7,2414 ; 2128.8,2349.8 2141.1,2349.8 ; 2128.8,2350.1 2141.1,2350.1 ; 2128.8,2350.4 2141.4,2350.4 ; 2128.8,2412.8 2144.7,2412.8 ; 2128.8,2413.1 2144.7,2413.1 ; 2128.8,2413.4 2144.7,2413.4 ; 2129.1,2350.7 2141.4,2350.7 ; 2129.1,2351 2141.7,2351 ; 2129.1,2351.3 2141.7,2351.3 ; 2129.1,2412.2 2145,2412.2 ; 2129.1,2412.5 2145,2412.5 ; 2129.4,2351.6 2141.7,2351.6 ; 2129.4,2351.9 2142,2351.9 ; 2129.4,2352.2 2142,2352.2 ; 2129.4,2352.5 2142,2352.5 ; 2129.4,2411.3 2145.3,2411.3 ; 2129.4,2411.6 2145,2411.6 ; 2129.4,2411.9 2145,2411.9 ; 2129.7,2352.8 2142.3,2352.8 ; 2129.7,2353.1 2142.3,2353.1 ; 2129.7,2353.4 2142.3,2353.4 ; 2129.7,2410.4 2145.3,2410.4 ; 2129.7,2410.7 2145.3,2410.7 ; 2129.7,2411 2145.3,2411 ; 2130,2353.7 2142.6,2353.7 ; 2130,2354 2142.6,2354 ; 2130,2354.3 2142.6,2354.3 ; 2130,2409.8 2145.6,2409.8 ; 2130,2410.1 2145.3,2410.1 ; 2130.3,2354.6 2142.9,2354.6 ; 2130.3,2354.9 2142.9,2354.9 ; 2130.3,2355.2 2142.9,2355.2 ; 2130.3,2355.5 2143.2,2355.5 ; 2130.3,2408.9 2145.6,2408.9 ; 2130.3,2409.2 2145.6,2409.2 ; 2130.3,2409.5 2145.6,2409.5 ; 2130.6,2355.8 2143.2,2355.8 ; 2130.6,2356.1 2143.2,2356.1 ; 2130.6,2356.4 2143.2,2356.4 ; 2130.6,2356.7 2143.5,2356.7 ; 2130.6,2408 2145.9,2408 ; 2130.6,2408.3 2145.9,2408.3 ; 2130.6,2408.6 2145.6,2408.6 ; 2130.6,2442.8 2138.4,2442.8 ; 2130.9,2357 2143.5,2357 ; 2130.9,2357.3 2143.5,2357.3 ; 2130.9,2357.6 2143.8,2357.6 ; 2130.9,2357.9 2143.8,2357.9 ; 2130.9,2406.8 2145.9,2406.8 ; 2130.9,2407.1 2145.9,2407.1 ; 2130.9,2407.4 2145.9,2407.4 ; 2130.9,2407.7 2145.9,2407.7 ; 2130.9,2443.1 2138.7,2443.1 ; 2131.2,2358.2 2143.8,2358.2 ; 2131.2,2358.5 2143.8,2358.5 ; 2131.2,2358.8 2144.1,2358.8 ; 2131.2,2359.1 2144.1,2359.1 ; 2131.2,2405.9 2146.2,2405.9 ; 2131.2,2406.2 2146.2,2406.2 ; 2131.2,2406.5 2146.2,2406.5 ; 2131.2,2443.4 2139.3,2443.4 ; 2131.5,2359.4 2144.1,2359.4 ; 2131.5,2359.7 2144.1,2359.7 ; 2131.5,2360 2144.4,2360 ; 2131.5,2360.3 2144.4,2360.3 ; 2131.5,2404.7 2146.5,2404.7 ; 2131.5,2405 2146.2,2405 ; 2131.5,2405.3 2146.2,2405.3 ; 2131.5,2405.6 2146.2,2405.6 ; 2131.5,2443.7 2139.6,2443.7 ; 2131.8,2360.6 2144.4,2360.6 ; 2131.8,2360.9 2144.4,2360.9 ; 2131.8,2361.2 2144.7,2361.2 ; 2131.8,2361.5 2144.7,2361.5 ; 2131.8,2361.8 2144.7,2361.8 ; 2131.8,2403.8 2146.5,2403.8 ; 2131.8,2404.1 2146.5,2404.1 ; 2131.8,2404.4 2146.5,2404.4 ; 2131.8,2444 2139.9,2444 ; 2132.1,2362.1 2144.7,2362.1 ; 2132.1,2362.4 2145,2362.4 ; 2132.1,2362.7 2145,2362.7 ; 2132.1,2363 2145,2363 ; 2132.1,2363.3 2145,2363.3 ; 2132.1,2402.3 2146.8,2402.3 ; 2132.1,2402.6 2146.8,2402.6 ; 2132.1,2402.9 2146.8,2402.9 ; 2132.1,2403.2 2146.5,2403.2 ; 2132.1,2403.5 2146.5,2403.5 ; 2132.1,2444.3 2140.2,2444.3 ; 2132.4,2363.6 2145,2363.6 ; 2132.4,2363.9 2145.3,2363.9 ; 2132.4,2364.2 2145.3,2364.2 ; 2132.4,2364.5 2145.3,2364.5 ; 2132.4,2364.8 2145.3,2364.8 ; 2132.4,2400.8 2146.8,2400.8 ; 2132.4,2401.1 2146.8,2401.1 ; 2132.4,2401.4 2146.8,2401.4 ; 2132.4,2401.7 2146.8,2401.7 ; 2132.4,2402 2146.8,2402 ; 2132.4,2444.6 2140.8,2444.6 ; 2132.7,2365.1 2145.6,2365.1 ; 2132.7,2365.4 2145.6,2365.4 ; 2132.7,2365.7 2145.6,2365.7 ; 2132.7,2366 2145.6,2366 ; 2132.7,2366.3 2145.6,2366.3 ; 2132.7,2366.6 2145.9,2366.6 ; 2132.7,2399.3 2147.1,2399.3 ; 2132.7,2399.6 2147.1,2399.6 ; 2132.7,2399.9 2147.1,2399.9 ; 2132.7,2400.2 2147.1,2400.2 ; 2132.7,2400.5 2147.1,2400.5 ; 2133,2366.9 2145.9,2366.9 ; 2133,2367.2 2145.9,2367.2 ; 2133,2367.5 2145.9,2367.5 ; 2133,2367.8 2145.9,2367.8 ; 2133,2368.1 2145.9,2368.1 ; 2133,2368.4 2146.2,2368.4 ; 2133,2368.7 2146.2,2368.7 ; 2133,2397.2 2147.4,2397.2 ; 2133,2397.5 2147.4,2397.5 ; 2133,2397.8 2147.1,2397.8 ; 2133,2398.1 2147.1,2398.1 ; 2133,2398.4 2147.1,2398.4 ; 2133,2398.7 2147.1,2398.7 ; 2133,2399 2147.1,2399 ; 2133,2444.9 2141.1,2444.9 ; 2133,2455.4 2154,2455.4 ; 2133.3,2369 2146.2,2369 ; 2133.3,2369.3 2146.2,2369.3 ; 2133.3,2369.6 2146.2,2369.6 ; 2133.3,2369.9 2146.2,2369.9 ; 2133.3,2370.2 2146.5,2370.2 ; 2133.3,2370.5 2146.5,2370.5 ; 2133.3,2370.8 2146.5,2370.8 ; 2133.3,2395.1 2147.4,2395.1 ; 2133.3,2395.4 2147.4,2395.4 ; 2133.3,2395.7 2147.4,2395.7 ; 2133.3,2396 2147.4,2396 ; 2133.3,2396.3 2147.4,2396.3 ; 2133.3,2396.6 2147.4,2396.6 ; 2133.3,2396.9 2147.4,2396.9 ; 2133.3,2445.2 2141.4,2445.2 ; 2133.6,2371.1 2146.5,2371.1 ; 2133.6,2371.4 2146.5,2371.4 ; 2133.6,2371.7 2146.5,2371.7 ; 2133.6,2372 2146.5,2372 ; 2133.6,2372.3 2146.8,2372.3 ; 2133.6,2372.6 2146.8,2372.6 ; 2133.6,2372.9 2146.8,2372.9 ; 2133.6,2373.2 2146.8,2373.2 ; 2133.6,2373.5 2146.8,2373.5 ; 2133.6,2373.8 2146.8,2373.8 ; 2133.6,2392.1 2147.7,2392.1 ; 2133.6,2392.4 2147.7,2392.4 ; 2133.6,2392.7 2147.7,2392.7 ; 2133.6,2393 2147.7,2393 ; 2133.6,2393.3 2147.7,2393.3 ; 2133.6,2393.6 2147.7,2393.6 ; 2133.6,2393.9 2147.4,2393.9 ; 2133.6,2394.2 2147.4,2394.2 ; 2133.6,2394.5 2147.4,2394.5 ; 2133.6,2394.8 2147.4,2394.8 ; 2133.6,2445.5 2141.7,2445.5 ; 2133.6,2455.1 2153.7,2455.1 ; 2133.6,2455.7 2154.3,2455.7 ; 2133.9,2374.1 2146.8,2374.1 ; 2133.9,2374.4 2147.1,2374.4 ; 2133.9,2374.7 2147.1,2374.7 ; 2133.9,2375 2147.1,2375 ; 2133.9,2375.3 2147.1,2375.3 ; 2133.9,2375.6 2147.1,2375.6 ; 2133.9,2375.9 2147.1,2375.9 ; 2133.9,2376.2 2147.1,2376.2 ; 2133.9,2376.5 2147.1,2376.5 ; 2133.9,2376.8 2147.1,2376.8 ; 2133.9,2377.1 2147.1,2377.1 ; 2133.9,2377.4 2147.4,2377.4 ; 2133.9,2377.7 2147.4,2377.7 ; 2133.9,2378 2147.4,2378 ; 2133.9,2378.3 2147.4,2378.3 ; 2133.9,2387.6 2147.7,2387.6 ; 2133.9,2387.9 2147.7,2387.9 ; 2133.9,2388.2 2147.7,2388.2 ; 2133.9,2388.5 2147.7,2388.5 ; 2133.9,2388.8 2147.7,2388.8 ; 2133.9,2389.1 2147.7,2389.1 ; 2133.9,2389.4 2147.7,2389.4 ; 2133.9,2389.7 2147.7,2389.7 ; 2133.9,2390 2147.7,2390 ; 2133.9,2390.3 2147.7,2390.3 ; 2133.9,2390.6 2147.7,2390.6 ; 2133.9,2390.9 2147.7,2390.9 ; 2133.9,2391.2 2147.7,2391.2 ; 2133.9,2391.5 2147.7,2391.5 ; 2133.9,2391.8 2147.7,2391.8 ; 2133.9,2445.8 2142.3,2445.8 ; 2134.2,2378.6 2147.4,2378.6 ; 2134.2,2378.9 2147.4,2378.9 ; 2134.2,2379.2 2147.4,2379.2 ; 2134.2,2379.5 2147.4,2379.5 ; 2134.2,2379.8 2147.4,2379.8 ; 2134.2,2380.1 2147.4,2380.1 ; 2134.2,2380.4 2147.4,2380.4 ; 2134.2,2380.7 2147.4,2380.7 ; 2134.2,2381 2147.4,2381 ; 2134.2,2381.3 2147.7,2381.3 ; 2134.2,2381.6 2147.7,2381.6 ; 2134.2,2381.9 2147.7,2381.9 ; 2134.2,2382.2 2147.7,2382.2 ; 2134.2,2382.5 2147.7,2382.5 ; 2134.2,2382.8 2147.7,2382.8 ; 2134.2,2383.1 2147.7,2383.1 ; 2134.2,2383.4 2147.7,2383.4 ; 2134.2,2383.7 2147.7,2383.7 ; 2134.2,2384 2147.7,2384 ; 2134.2,2384.3 2147.7,2384.3 ; 2134.2,2384.6 2147.7,2384.6 ; 2134.2,2384.9 2147.7,2384.9 ; 2134.2,2385.2 2147.7,2385.2 ; 2134.2,2385.5 2147.7,2385.5 ; 2134.2,2385.8 2147.7,2385.8 ; 2134.2,2386.1 2147.7,2386.1 ; 2134.2,2386.4 2147.7,2386.4 ; 2134.2,2386.7 2147.7,2386.7 ; 2134.2,2387 2147.7,2387 ; 2134.2,2387.3 2147.7,2387.3 ; 2134.2,2446.1 2142.6,2446.1 ; 2134.5,2446.4 2142.9,2446.4 ; 2134.5,2456 2154.6,2456 ; 2134.8,2446.7 2143.2,2446.7 ; 2135.1,2454.8 2153.1,2454.8 ; 2135.4,2447 2143.5,2447 ; 2135.4,2456.3 2154.9,2456.3 ; 2135.7,2447.3 2144.1,2447.3 ; 2136,2447.6 2144.4,2447.6 ; 2136.3,2447.9 2144.7,2447.9 ; 2136.3,2454.5 2152.8,2454.5 ; 2136.3,2456.6 2155.5,2456.6 ; 2136.6,2448.2 2145,2448.2 ; 2136.9,2448.5 2145.6,2448.5 ; 2137.2,2448.8 2145.9,2448.8 ; 2137.2,2456.9 2155.8,2456.9 ; 2137.8,2449.1 2146.2,2449.1 ; 2137.8,2454.2 2152.5,2454.2 ; 2138.1,2449.4 2146.5,2449.4 ; 2138.1,2457.2 2156.1,2457.2 ; 2138.4,2449.7 2146.8,2449.7 ; 2138.7,2450 2147.4,2450 ; 2139,2450.3 2147.7,2450.3 ; 2139,2453.9 2152.2,2453.9 ; 2139,2457.5 2156.4,2457.5 ; 2139.3,2450.6 2148,2450.6 ; 2139.6,2450.9 2148.3,2450.9 ; 2139.9,2451.2 2148.9,2451.2 ; 2139.9,2457.8 2157,2457.8 ; 2140.2,2453.6 2151.6,2453.6 ; 2140.5,2451.5 2149.2,2451.5 ; 2140.8,2451.8 2149.5,2451.8 ; 2140.8,2458.1 2157.3,2458.1 ; 2141.1,2452.1 2149.8,2452.1 ; 2141.4,2452.4 2150.4,2452.4 ; 2141.7,2452.7 2150.7,2452.7 ; 2141.7,2453.3 2151.3,2453.3 ; 2141.7,2458.4 2157.6,2458.4 ; 2142,2453 2151,2453 ; 2142.6,2458.7 2157.9,2458.7 ; 2143.5,2459 2158.5,2459 ; 2144.4,2459.3 2158.8,2459.3 ; 2145.6,2459.6 2159.1,2459.6 ; 2146.5,2459.9 2159.4,2459.9 ; 2147.4,2460.2 2159.7,2460.2 ; 2148.3,2460.5 2160.3,2460.5 ; 2149.2,2460.8 2160.6,2460.8 ; 2150.1,2461.1 2160.9,2461.1 ; 2151,2461.4 2161.2,2461.4 ; 2151.9,2461.7 2161.8,2461.7 ; 2152.8,2462 2162.1,2462 ; 2153.7,2462.3 2162.4,2462.3 ; 2154.6,2462.6 2162.7,2462.6 ; 2155.5,2462.9 2163,2462.9 ; 2156.4,2463.2 2163.6,2463.2 ; 2157.3,2463.5 2163.9,2463.5 ; 2158.2,2463.8 2164.2,2463.8 ; 2159.1,2464.1 2164.5,2464.1 ; 2160.3,2464.4 2165.1,2464.4 ; 2161.2,2464.7 2165.4,2464.7 ; 2162.1,2465 2165.7,2465 ; 2163,2465.3 2166,2465.3 ; 2163.9,2465.6 2166.6,2465.6 ; 2164.8,2465.9 2166.9,2465.9 ; 2165.7,2466.2 2167.2,2466.2 ; 2166.6,2466.5 2167.5,2466.5
  Top Layer w10: 1795,2595.07 1795,2715.07 2345,2715.07 2345,2595.07 1795,2595.07

## Other copper
Top Layer:
  rectangle net NetJ6_2: 3250,1080 3325,1400
  rectangle net NetJ1_2: 3005,1050 3085,1415
  rectangle net NetJ1_1: 2905,1030 2980,1415
  text "ADXL" at 3395,3625 h60
  text "CMPS" at 1660,3615.53 h60
  text "EEPROM" at 1054.47,3560 h60 r90
  text "I2C Module" at 2035,3065.53 h60
  text "V1.0.0" at 2035,2980.88 h100
  text "26-May-2022" at 2025,2918.95 h60
  text "EXPANDER" at 3840,2785 h60
  text "5" at 4205,2700.53 h60
  text "A-Debug Lab" at 1825,2635 h100
  text ";-)" at 3729.88,2620 h200 r270
  text "BMP" at 3095,2370 h60
  text "SHT" at 1544.47,2345 h60 r90
  text "3.3" at 1030,2310.53 h60
  text "LM75" at 3355,1890.53 h60
  text "RTC" at 1249.47,1845 h60 r90
  text "BH1750" at 4070,1690.53 h60
  text "SHT" at 1575,1650.53 h60
  text "+" at 3355,1451.14 h60
  text "Ario Electronics" at 1340,1325.88 h100
  text "OLED" at 1080,1320.53 h60
  text "ariopulse.com" at 1425,1264.77 h70
  text "SDA" at 2785,1255.53 h60
  text "Soil" at 3705,1245.53 h60
  text "GY891" at 2025,1240.53 h60
  text "GND" at 1245,1070.53 h60

## Silkscreen, mask and mechanical layers (free items; w line width, h text height)
Mechanical 1:
  the board outline again, w10